# Altium PCB WatchX2_RoundScreen.PcbDoc
Units mil, origin at the board's own origin, x right, y up, seen from the top; angles counter-clockwise.
Board outline 6000 x 4000 mil, 2 copper layers (Top Layer, Bottom Layer); 92 components, 72 nets, 345 pads, 0 vias.
Unrouted connection lines stored in the file: 237.
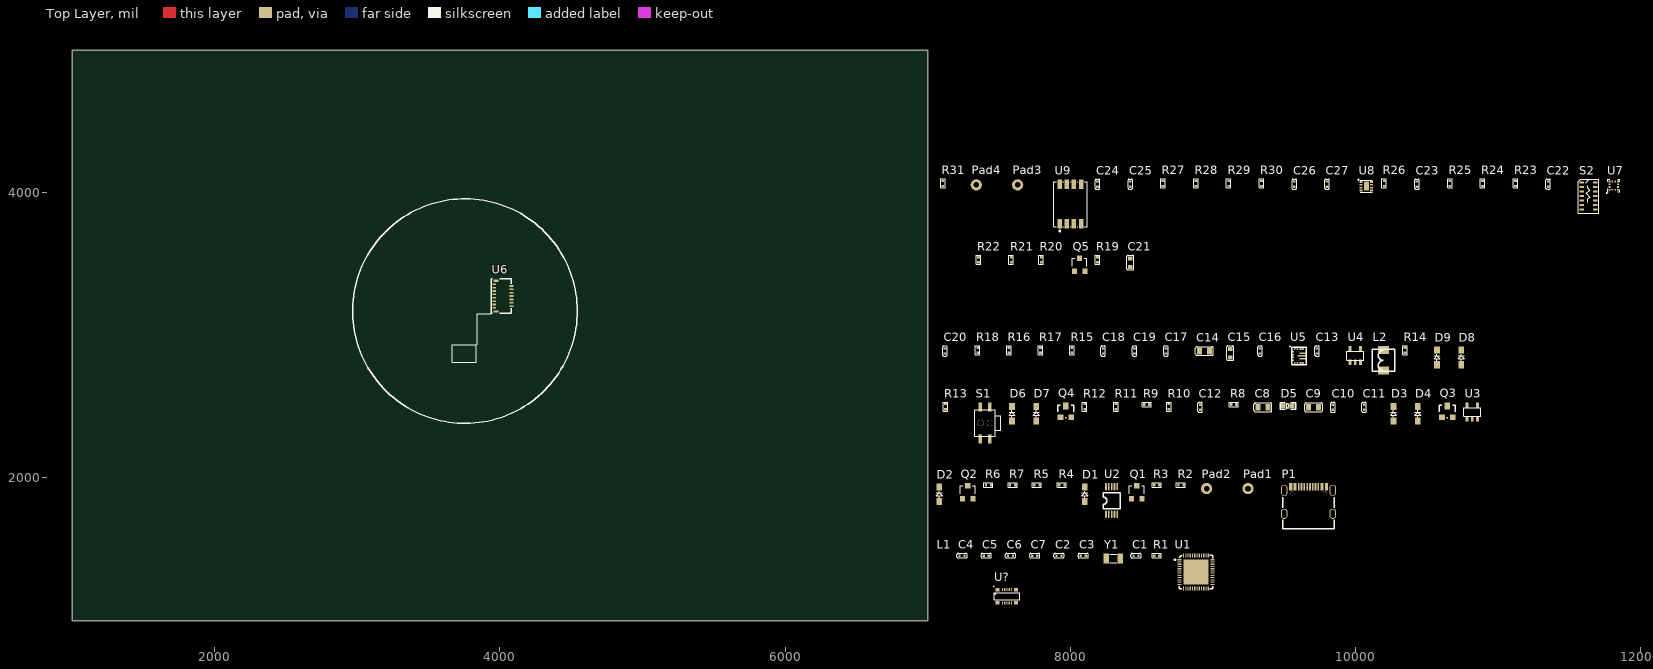
[diagram p0: Top Layer view]
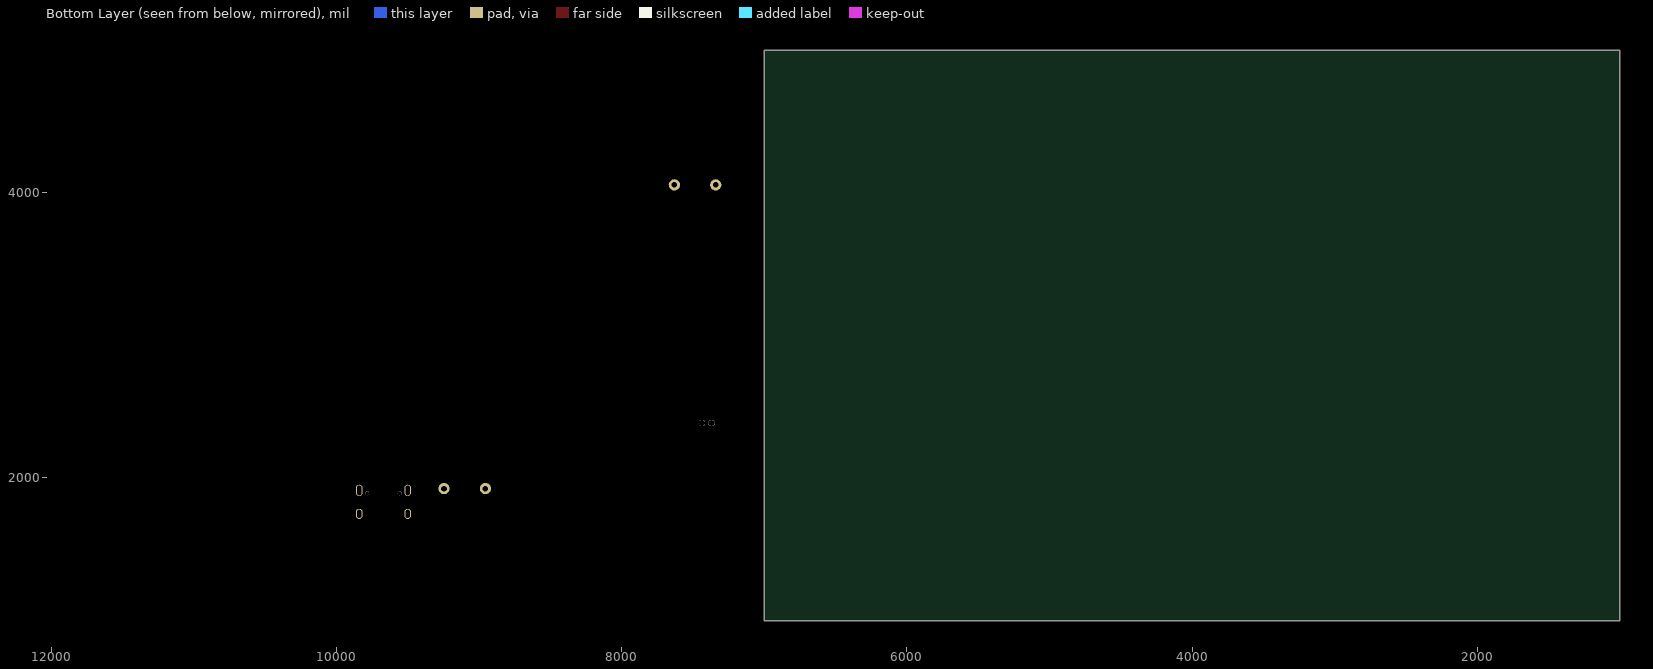
[diagram p1: Bottom Layer view, seen from below]

## Layer stack, top to bottom
Top Solder: solder mask 0.4, Solder Resist, Dk 3.5
Top Layer: signal copper 1.4
Dielectric 1: dielectric 12.6, FR-4, Dk 4.8
Bottom Layer: signal copper 1.4
Bottom Solder: solder mask 0.4, Solder Resist, Dk 3.5

## Board outline
1000,1000 7000,1000 7000,5000 1000,5000

## Design rules (kind name [scope] priority, off if disabled: settings)
Clearance [All] p1: gap=10
PolygonConnect [All] p1: connectstyle=Relief reliefconductorwidth=10 reliefentries=4 polygonreliefangle="90 Angle" airgapwidth=10
RoutingVias [All] p1: holewidth=28 width=50 viastyle="Through Hole" minholewidth=28 minwidth=50 maxholewidth=28 maxwidth=50
SolderMaskExpansion [All] p1: expansion=4
Width [All] p1: maxlimit=10 minlimit=10 preferedwidth=10
30 further rules are at their usual default settings.

## Classes and differential pairs
component class WT2_Sensors: C22 C23 C24 C25 C26 C27 Pad3 Pad4 R23 R24 R25 R26 R27 R28 R29 R30 R31 S2 U7 U8 U9
component class WT2_Screen: C21 Q5 R19 R20 R21 R22 U6 U?
component class WT2_Power: C8 C9 C10 C11 C12 C13 C14 C15 C16 C17 C18 C19 C20 D3 D4 D5 D6 D7 D8 D9 L2 Q3 Q4 R8 R9 R10 R11 R12 R13 R14 R15 R16 R17 R18 S1 U3 U4 U5
component class WT2_Ports: D1 D2 P1 Pad1 Pad2 Q1 Q2 R2 R3 R4 R5 R6 R7 U2
component class WT2_MCU: C1 C2 C3 C4 C5 C6 C7 L1 R1 U1 Y1

## Components (designator, comment, footprint, x,y, rotation, side; value= is the part's Value field where it differs from the comment)
C1 "104" 电容_C0402 8460,1455 r0 top
C2 "22pf" 电容_C0402 7920,1455 r0 top
C3 "22pf" 电容_C0402 8090,1455 r0 top
C4 "1uF" 电容_C0402 7240,1455 r0 top
C5 "1uF" 电容_C0402 7410,1455 r0 top
C6 "1uF" 电容_C0402 7580,1455 r0 top
C7 "1uF" 电容_C0402 7750,1455 r0 top
C8 "4.7UF" 电容_C0805 9350,2495 r0 top
C9 "4.7UF" 电容_C0805 9705,2495 r0 top
C10 "104" 电容_C0402 9840,2495 r90 top
C11 "104" 电容_C0402 10060,2495 r90 top
C12 "104" 电容_C0402 8910,2495 r90 top
C13 "105" 电容_C0402 9730,2890 r90 top
C14 "106" 电容_C0805 8940,2890 r0 top
C15 "106" 电容_C0603 9120,2875 r90 top
C16 "105" 电容_C0402 9330,2890 r90 top
C17 "105" 电容_C0402 8670,2890 r90 top
C18 "105" 电容_C0402 8230,2890 r90 top
C19 "105" 电容_C0402 8450,2890 r90 top
C20 "104" 电容_C0402 7120,2890 r90 top
C21 "105" 电容_C0603 8420,3510 r90 top
C22 "104" 电容_C0402 11350,4060 r90 top
C23 "105" 电容_C0402 10430,4060 r90 top
C24 "0.1uF" 电容_C0402 8190,4060 r90 top
C25 "0.1uF" 电容_C0402 8420,4060 r90 top
C26 "104" 电容_C0402 9570,4060 r90 top
C27 "103" 电容_C0402 9800,4060 r90 top
D1 "1N5819" 二极管_SOD-323 8100,1885 r90 top
D2 "1N5819" 二极管_SOD-323 7080,1885 r90 top
D3 "1N4007" 二极管_SOD-323 10265,2450 r90 top
D4 "1N4007" 二极管_SOD-323 10435,2450 r90 top
D5 "red" LED_0603 9525,2505 r0 top
D6 "1N4148" 二极管_SOD-323 7590,2450 r90 top
D7 "1N4148" 二极管_SOD-323 7760,2450 r90 top
D8 "1N4148" 二极管_SOD-323 10740,2845 r90 top
D9 "1N4148" 二极管_SOD-323 10570,2845 r90 top
L1 "LOGO" "LOGO REV L BS" 7095,1260 r90 top
L2 "1.5uH" 变压器电感_0420 10195,2825 r0 top
P1 "Type-C USB" Type-C_16P 9670,1790 r0 top
Pad1 "BAT" Pad_A 9245,1925 r90 top
Pad2 "GND" Pad_A 8955,1925 r90 top
Pad3 "Motor1" Pad_A 7630,4055 r90 top
Pad4 "Motor2" Pad_A 7340,4055 r90 top
Q1 "SI2302" MOS_SOT-23 8465,1900 r0 top
Q2 "SI2302" MOS_SOT-23 7280,1900 r0 top
Q3 "MOSFET-P" SOT23 10600,2425 r0 top
Q4 "AON6512" SOT-23 7925,2425 r0 top
Q5 "AO3400" MOS_SOT-23 8065,3495 r0 top
R1 "10K" 电阻_R0402 8605,1455 r0 top
R2 "4.7K" 电阻_R0402 8775,1950 r0 top
R3 "10K" 电阻_R0402 8605,1950 r0 top
R4 "100R" 电阻_R0402 7940,1950 r0 top
R5 "100R" 电阻_R0402 7765,1950 r0 top
R6 "10K" 电阻_R0402 7425,1950 r0 top
R7 "10K" 电阻_R0402 7595,1950 r0 top
R8 "20k" 电阻_R0402 9145,2515 r0 top
R9 "20k" 电阻_R0402 8535,2515 r0 top
R10 "2K" 电阻_R0402 8690,2500 r90 top
R11 "470R" 电阻_R0402 8320,2500 r90 top
R12 "40k" 电阻_R0402 8100,2500 r90 top
R13 "4.7k" 电阻_R0402 7125,2500 r90 top
R14 "20k" 电阻_R0402 10345,2895 r90 top
R15 "10K" 电阻_R0402 8010,2895 r90 top
R16 "470K" 电阻_R0402 7570,2895 r90 top
R17 "100k" 电阻_R0402 7790,2895 r90 top
R18 "150K" 电阻_R0402 7350,2895 r90 top
R19 "10R" 电阻_R0402 8190,3530 r90 top
R20 "10K" 电阻_R0402 7795,3530 r90 top
R21 "10K" 电阻_R0402 7585,3530 r90 top
R22 "10K" 电阻_R0402 7355,3530 r90 top
R23 "4.7K" 电阻_R0402 11120,4065 r90 top
R24 "4.7K" 电阻_R0402 10890,4065 r90 top
R25 "4.7K" 电阻_R0402 10660,4065 r90 top
R26 "4.7K" 电阻_R0402 10200,4065 r90 top
R27 "10K" 电阻_R0402 8650,4065 r90 top
R28 "10K" 电阻_R0402 8880,4065 r90 top
R29 "10K" 电阻_R0402 9110,4065 r90 top
R30 "10K" 电阻_R0402 9340,4065 r90 top
R31 "10K" 电阻_R0402 7105,4065 r90 top
S1 "SW-PB" KEY-TE26EA 7370,2385 r90 top
S2 "MAX30102" MAX30102 11585,4070 r0 top
U1 "AT32F403CGU6" AT主控_QFN48(6X6) 8880,1340 r0 top
U2 "CH340E" MSOP10 8250,1745 r90 top
U3 "MCP73831" SOT23-5 10780,2415 r0 top
U4 "LP5907-1.8" SOT23-5 9960,2810 r0 top
U5 "TPS63070" VQFN-15-HR 9595,2855 r0 top
U6 "TFT" FPC-0.30mm-15P 4020,3275 r270 top
U7 "LIS2DS12" LGA-12_2*2mm 11810,4050 r0 top
U8 "DRV883x" WSON-8_2*2 10075,4045 r0 top
U9 "SD" LGA-8_6*8mm2 8000,3920 r90 top
U? "14M010" "OK-14F010 10PIN" 7490,1125 r0 top
Y1 "32.768K" 晶振_3215 8300,1435 r0 top

## Footprints (in the part's own frame and the unit in brackets; to place one, negate y for a bottom-side part, rotate by r counter-clockwise, add the part's x,y. Pads: shape width x height; smd on the part's side, far side on the other; paste and mask are expansions set on the pad)
AT主控_QFN48(6X6) [mm]
  rect 4.5x4.5 smd: 0(0,0)
  rect 0.7x0.2 smd: 1(-2.95,2.2) 2(-2.95,1.8) 3(-2.95,1.4) 4(-2.95,1) 5(-2.95,0.6) 6(-2.95,0.2) 7(-2.95,-0.2) 8(-2.95,-0.6) 9(-2.95,-1) 10(-2.95,-1.4) 11(-2.95,-1.8) 12(-2.95,-2.2) 25(2.95,-2.2) 26(2.95,-1.8) 27(2.95,-1.4) 28(2.95,-1) 29(2.95,-0.6) 30(2.95,-0.2) 31(2.95,0.2) 32(2.95,0.6) 33(2.95,1) 34(2.95,1.4) 35(2.95,1.8) 36(2.95,2.2)
  rect 0.2x0.7 smd: 13(-2.2,-2.95) 14(-1.8,-2.95) 15(-1.4,-2.95) 16(-1,-2.95) 17(-0.6,-2.95) 18(-0.2,-2.95) 19(0.2,-2.95) 20(0.6,-2.95) 21(1,-2.95) 22(1.4,-2.95) 23(1.8,-2.95) 24(2.2,-2.95) 37(2.2,2.95) 38(1.8,2.95) 39(1.4,2.95) 40(1,2.95) 41(0.6,2.95) 42(0.2,2.95) 43(-0.2,2.95) 44(-0.6,2.95) 45(-1,2.95) 46(-1.4,2.95) 47(-1.8,2.95) 48(-2.2,2.95)
  silkscreen extent -3.87,-3 3,3
FPC-0.30mm-15P [mm] "FPC翻盖式 下接"
  rect 0.3x0.65 smd: 1(2.1,-1.55) 2(1.8,1.55) 3(1.5,-1.55) 4(1.2,1.55) 5(0.9,-1.55) 6(0.6,1.55) 7(0.3,-1.55) 8(0,1.55) 9(-0.3,-1.55) 10(-0.6,1.55) 11(-0.9,-1.55) 12(-1.2,1.55) 13(-1.5,-1.55) 14(-1.8,1.55) 15(-2.1,-1.55)
  rect 0.4x0.95 smd: 16(-2.75,-1.2) 17(2.75,-1.2)
  silkscreen extent -3.1,-2.05 3.1,1.5
KEY-TE26EA [mil]
  round 45 hole 45: 0(-0.01,0.39) 0(0.01,-66.61)
  rect 62.99x23.62 smd: 1(-111.5,-64.98) 1(111.5,-64.98) 2(-111.5,2.02) 2(111.5,2.02)
  silkscreen extent -92,-142 92,39, body extent -116,-142 117,35, height 64
LED_0603 [mm]
  rect 0.8x0.8 smd paste-0.1: A(-0.8,0) K(0.8,0)
  silkscreen extent -1.4,-0.6 1.4,0.6, body extent -0.8,-0.4 0.82,0.4, height 0.6
LGA-8_6*8mm2 [mm]
  rect 1.7x0.8 smd: 1(-3.5,1.905) 2(-3.5,0.635) 3(-3.5,-0.635) 4(-3.5,-1.905) 5(3.5,-1.905) 6(3.5,-0.635) 7(3.5,0.635) 8(3.5,1.905)
  silkscreen extent -4.94,-3 4,3
LGA-12_2*2mm [mm]
  rect 0.3x0.33 smd: 1(-0.75,-0.75) 2(-0.25,-0.75) 3(0.25,-0.75) 4(0.75,-0.75) 7(0.75,0.75) 8(0.25,0.75) 9(-0.25,0.75) 10(-0.75,0.75)
  rect 0.3x0.3 smd: 5(0.75,-0.25) 6(0.75,0.25) 11(-0.75,0.25) 12(-0.75,-0.25)
  silkscreen extent -1.3,-1.38 1.09,1.09
"LOGO REV L BS" [mil]
MAX30102 [mm] "血氧浓度传感器"
  rect 0.75x0.35 smd: 1(0,0) 2(0,-0.8) 3(0,-1.6) 4(0,-2.4) 5(0,-3.2) 6(0,-4) 7(0,-4.8) 8(2.4,-4.8) 9(2.4,-4) 10(2.4,-3.2) 11(2.4,-2.4) 12(2.4,-1.6) 13(2.4,-0.8) 14(2.4,0)
  silkscreen extent -0.6,-5.4 3,0.6
MOS_SOT-23 [mm]
  rect 0.9x0.95 smd: 1(-0.95,-1.175) 2(0,1.175) 3(0.95,-1.175)
  silkscreen extent -1.3,-0.3 1.3,1.18, body extent -1.45,-1.4 1.45,1.4, height 1.2
MSOP10 [mm] "VSOP8"
  oval 1.3x0.3 smd: 1(0,0) 2(0,-0.5) 3(0,-1) 4(0,-1.5) 5(0,-2) 6(4.928,-2) 7(4.928,-1.5) 8(4.928,-1) 9(4.928,-0.5) 10(4.928,0)
  silkscreen extent 0.99,-2.54 3.86,0.48, body extent -0.11,-2.62 5.04,0.58, height 1.09
"OK-14F010 10PIN" [mm]
  rect 0.7x0.6 smd: 0(0,0) 0(0,2.3) 0(3.3,0) 0(3.3,2.3)
  rect 0.23x0.5 smd: 1(0.85,2.35) 2(1.25,2.35) 3(1.65,2.35) 4(2.05,2.35) 5(2.45,2.35) 6(2.45,-0.025) 7(2.05,-0.025) 8(1.65,-0.025) 9(1.25,-0.025) 10(0.85,-0.025)
  silkscreen extent -0.7,0.55 3.93,2.9
Pad_A [mm]
  round 2 hole 1: 1(0,0)
SOT23 [mil]
  rect 40x40 smd: 1(4.88,0.63) 3(79.88,0.63)
  rect 40x50 smd: 2(41.88,80.63)
  silkscreen extent -15,-4 100,86, body extent -15,-11 99,99, height 47
SOT23-5 [mm]
  rect 0.5x1 smd: 1(0,0) 2(0.95,0) 3(1.9,0) 4(1.9,2.4) 5(0,2.4)
  silkscreen extent -0.55,0.4 2.45,2, body extent -0.5,-0.2 2.4,2.6, height 1.09
SOT-23 [mil]
  rect 40x40 smd: 1(4.88,0.63) 2(79.88,0.63)
  rect 40x50 smd: 3(41.88,80.63)
  silkscreen extent -15,-4 100,86, body extent -15,-11 99,99, height 47
Type-C_16P [mm] "Type-C母座"
  oval 1.2x2 hole 0.7 slot 1.7 at 90 deg: 1(-4.329,3.122) 2(4.311,3.122)
  oval 1.2x1.8 hole 0.7 slot 1.4 at 90 deg: 3(-4.329,-1.058) 4(4.311,-1.058)
  rect 0.3x1.3 smd: A1(-3.359,3.772) A4(-2.559,3.772) A5(-1.259,3.772) A6(-0.259,3.772) A7(0.241,3.772) A8(1.241,3.772) A9(2.541,3.772) A12(3.341,3.772) B1(3.041,3.772) B4(2.241,3.772) B5(1.741,3.772) B6(0.741,3.772) B7(-0.759,3.772) B8(-1.759,3.772) B9(-2.259,3.772) B12(-3.059,3.772)
  round 0.7 hole 0.7 unplated: ""(-2.899,2.592) ""(2.881,2.592)
  silkscreen extent -4.58,-3.72 4.56,1.93
VQFN-15-HR [mm] "VQFN"
  oval 0.599x0.25 smd: 1(-0.964,0.759) 2(-0.964,0.251) 3(-0.964,-0.257) 4(-0.964,-0.739)
  oval 0.25x0.599 smd: 5(-0.573,-1.394) 6(-0.09,-1.394) 7(0.418,-1.394) 7(0.926,-1.394) 12(0.418,1.394) 12(0.926,1.394) 14(-0.09,1.394) 15(-0.573,1.394)
  oval 0.75x0.25 smd: 7(0.672,-1.217) 12(0.679,1.222)
  oval 1.349x0.25 smd: 9(0.964,-0.495) 11(0.964,0.495)
  oval 1.7x0.25 smd: 10(0.789,0.013)
  silkscreen extent -1.45,-1.55 1.48,1.78
WSON-8_2*2 [mil]
  rect 20.5x11.5 smd: 1(-37.4,29.5) 2(-37.4,10.5) 3(-37.4,-9.5) 4(-37.4,-29.5) 5(37.4,-29.5) 6(37.4,-9.5) 7(37.4,10.5) 8(37.4,29.5)
  rect 35.5x63.5 smd: 9(0,0.5)
  silkscreen extent -58,-41 41,48
二极管_SOD-323 [mil]
  rect 50x40 smd: A(-51.18,0) K(51.18,0)
  silkscreen extent -23,-20 23,20, body extent -51,-26 51,26, height 39
变压器电感_0420 [mm]
  rect 2x1.4 smd: 1(0,-1.8) 2(0,1.8)
  silkscreen extent -2,-2 2,2
晶振_3215 [mm] "XTAL SMD 3.2 x 1.5 mm"
  rect 1x1.8 smd: 1(-1.25,0) 2(1.25,0)
  silkscreen extent -0.6,-0.75 0.6,0.75, body extent -1.6,-0.75 1.6,0.75, height 0.81
电容_C0402 [mm]
  rect 0.4x0.5 smd: 1(-0.45,0) 2(0.45,0)
  silkscreen extent -0.9,-0.4 0.9,0.4, body extent -0.5,-0.25 0.5,0.25, height 0.5
电容_C0603 [mm]
  rect 0.7x0.8 smd: 1(-0.75,0) 2(0.75,0)
  silkscreen extent -1.3,-0.6 1.3,0.6, body extent -0.8,-0.4 0.8,0.4, height 0.3
电容_C0805 [mm]
  rect 0.9x1.2 smd: 1(-0.9,0) 2(0.9,0)
  silkscreen extent -1.6,-0.8 1.6,0.8, body extent -1,-0.62 1,0.63, height 0.77
电阻_R0402 [mm]
  rect 0.4x0.5 smd: 1(-0.45,0) 2(0.45,0)
  silkscreen extent -0.8,-0.4 0.8,0.4, body extent -0.5,-0.25 0.5,0.25, height 0.35

## Part data
C1 C2 C3 C4 C5 C6 C7 C8 C9 C10 C11 C12 C13 C14 C15 C16 C17 C18 C19 C20 C21 C22 C23 C24 C25 C26 C27: library part cap
D1 D2 D3 D4 D6 D7 D8 D9: library part Diode
D5: library part LED
L1: library part LOGO_TRIGGER
L2: library part "Inductor Iron 2"
P1: library part "Type-C USB Easy 16PIN"
Pad1 Pad2 Pad3 Pad4: library part Pad
Q1 Q2 Q4 Q5: library part MOSFET-N
Q3: "P-Channel MOSFET"
R1 R2 R3 R4 R5 R6 R7 R8 R9 R10 R11 R12 R13 R14 R15 R16 R17 R18 R19 R20 R21 R22 R23 R24 R25 R26 R27 R28 R29 R30 R31: library part Res
S1: "按键"
S2: "血氧浓度传感器"
U3: "线性充电管理控制器"
U4: library part LP5907, "LDO"
U5: "降压-升压转换器"
U6: library part TFT_IPS1-1.54寸240*240-AML015410V1, "IPS电容式触摸屏"
U7: "运动传感器"
U9: library part SDNAND
U?: library part OK-14M010-04, "奇亚板对板连接器"
Y1: library part XTAL_A

## Nets (pads, with @x,y where several pads share a name; then routed paths per layer and width w, separated by ;. In a path a pad name is that pad's centre, name@x,y a point inside that pad or via, vN(x,y) a via of type N, cw(c..) or ccw(c..) an arc to the next point about the centre after c; other vN are vias at no path point)
1.8V: C17.2 C18.2 C19.2 C23.1 Q1.1 Q2.1 R3.1 R6.1 S2.11 U4.5 U7.9 U7.10
3V3: C4.2 C5.2 C6.2 C7.2 C15.1 C16.1 C22.2 C25.2 C26.1 C27.1 R1.2 R2.1 R7.1 R16.1 R17.1 R23.1 R24.2 R25.2 R26.2 R27.1 R28.1 R29.1 R30.1 R31.2 S2.9 S2.10 U1.9 U1.24 U1.36 U1.48 U2.7 U2.10 U5.7 U8.7 U8.8 U9.8
ASCL: D2.K Q2.2 R7.2 R20.2 U1.21 U?.9
ASDA: D1.K Q1.2 R2.2 R22.2 U1.22 U?.7
BAT: C9.2 C10.1 C11.1 C24.1 D3.A Pad1.1 Q3.3 R9.2 U3.3 U8.1
BAT_CHG: R11.1 U1.2 U3.1
BAT_DET: R8.1 R12.2 U1.11
BAT_DET_EN: U1.12
BAT_OUT: C13.2 C14.1 Q3.2 R8.2 R15.2 S1.1 U4.1 U4.3 U5.12
BSCL: D2.A Q2.3 R6.2 S2.2 U7.1
BSDA: D1.A Q1.3 R3.2 S2.3 U7.4
EC_KET: D6.K D7.K R13.1
EC_KEY_DET: D7.A U1.10
GND: C1.1 C2.2 C3.2 C4.1 C5.1 C6.1 C7.1 C8.1 C9.1 C10.2 C11.2 C12.2 C13.1 C14.2 C15.2 C16.2 C17.1 C18.1 C19.1 C20.1 C21.2 C22.1 C23.2 C24.2 C25.1 C26.2 C27.2 P1.A1 P1.A12 P1.B1 P1.B12 Pad2.1 Q4.3 Q5.3 R10.1 R12.1 R14.1 R18.2 R21.1 S2.4 S2.12 U1.0 U1.8 U1.23 U1.35 U1.44 U1.47 U2.3 U3.2 U4.2 U5.4 U5.6 U5.10 U5.15 U6.2 U6.12 U6.13 U6.16 U6.17 U7.5 U7.6 U7.7 U7.8 U8.4 U9.4 U?.3
HRS_INT: R24.1 S2.13
LIS_CS: R23.2 U7.2
LIS_INT1: R26.1 U1.45 U7.12
LIS_INT2: R25.1 U1.46 U7.11
LIS_SD0: U7.3
M1-IN1: U1.39 U8.6
M1-IN2: U1.40 U8.5
MCU_RX: R5.1 U1.31
MCU_TX: R4.1 U1.30
NetC20_2: C20.2 U5.3
NetD3_K: D3.K D4.A
NetD5_K: D5.K R11.2
NetD6_A: D6.A Q3.1 Q4.2 R9.1
NetD8_K: D8.K D9.K Q4.1 R14.2
NetL2_1: L2.1 U5.11
NetL2_2: L2.2 U5.9
NetPad3_1: Pad3.1 U8.2
NetPad4_1: Pad4.1 U8.3
NetQ5_2: Q5.2 R19.1
NetR4_2: R4.2 U2.9
NetR5_2: R5.2 U2.8
NetR10_2: R10.2 U3.5
NetR13_2: R13.2 S1.2
NetR15_1: R15.1 U5.1 U5.14
NetR16_2: R16.2 R18.1 U5.5
NetR17_2: R17.2 U5.2
OSC32_IN: C2.1 U1.3 Y1.1
OSC32_OUT: C3.1 U1.4 Y1.2
PA3: U1.13 U6.5
PA4: U1.14 U6.7
PA5: U1.15 U6.6
PA6: U1.16
PA7: U1.17 U6.4
PA8: U1.29
PA11: Q5.1 R21.2 U1.32
PA12: D9.A U1.33
PB0: U1.18
PB1: U1.19
PB2: U1.20
PB5: U1.41 U6.3
PB6: U1.42 U6.8
PB7: U1.43
PB12: U1.25 U?.10
RST: C1.2 R1.1 U1.7 U?.6
SCREEN_VCC: C21.1 R20.1 R22.1 U6.9 U6.10 U6.11 U6.14 U6.15 U?.2
SD_CS: R27.2 U1.38 U9.2
SD_DI: R31.1 U1.28 U9.5
SD_DO: R30.2 U1.27 U9.6
SD_SCLK: U1.26 U9.3
SD_SDD1: R29.2 U9.7
SD_SDD2: R28.2 U9.1
SWCLK: P1.A8 P1.B8 U1.37
SWDIO: P1.A5 P1.B5 U1.34
TFT_LEDK: R19.2 U6.1
USB_D+: P1.A6 P1.B6 U2.1
USB_D-: P1.A7 P1.B7 U2.2
USB_VCC: C8.2 D5.A D8.A P1.A4 P1.A9 P1.B4 P1.B9 U3.4
VBAT: C12.1 D4.K U1.1
pads on no net: P1. P1.1 P1.2 P1.3 P1.4 S1.0 S2.1 S2.5 S2.6 S2.7 S2.8 S2.14 U1.5 U1.6 U2.4 U2.5 U2.6 U4.4 U8.9 U?.0 U?.1 U?.4 U?.5 U?.8

## Silkscreen, mask and mechanical layers (free items; w line width, h text height)
Top Overlay:
  circle w10: c3755,3170 r787.4
  lines w6: 3840.82,2935.35 3840.82,3151.89 3939.25,3151.89 ; 3664.88,2812.36 3834.88,2812.36 3834.88,2932.36 3664.88,2932.36 3664.88,2812.36